# Altium PCB stepperRegulator.PcbDoc
Units mil, origin at the board's own origin, x right, y up, seen from the top; angles counter-clockwise.
Board outline 4921.26 x 3937.01 mil, 2 copper layers (Top Layer, Bottom Layer); 128 components, 46 nets, 316 pads, 67 vias.
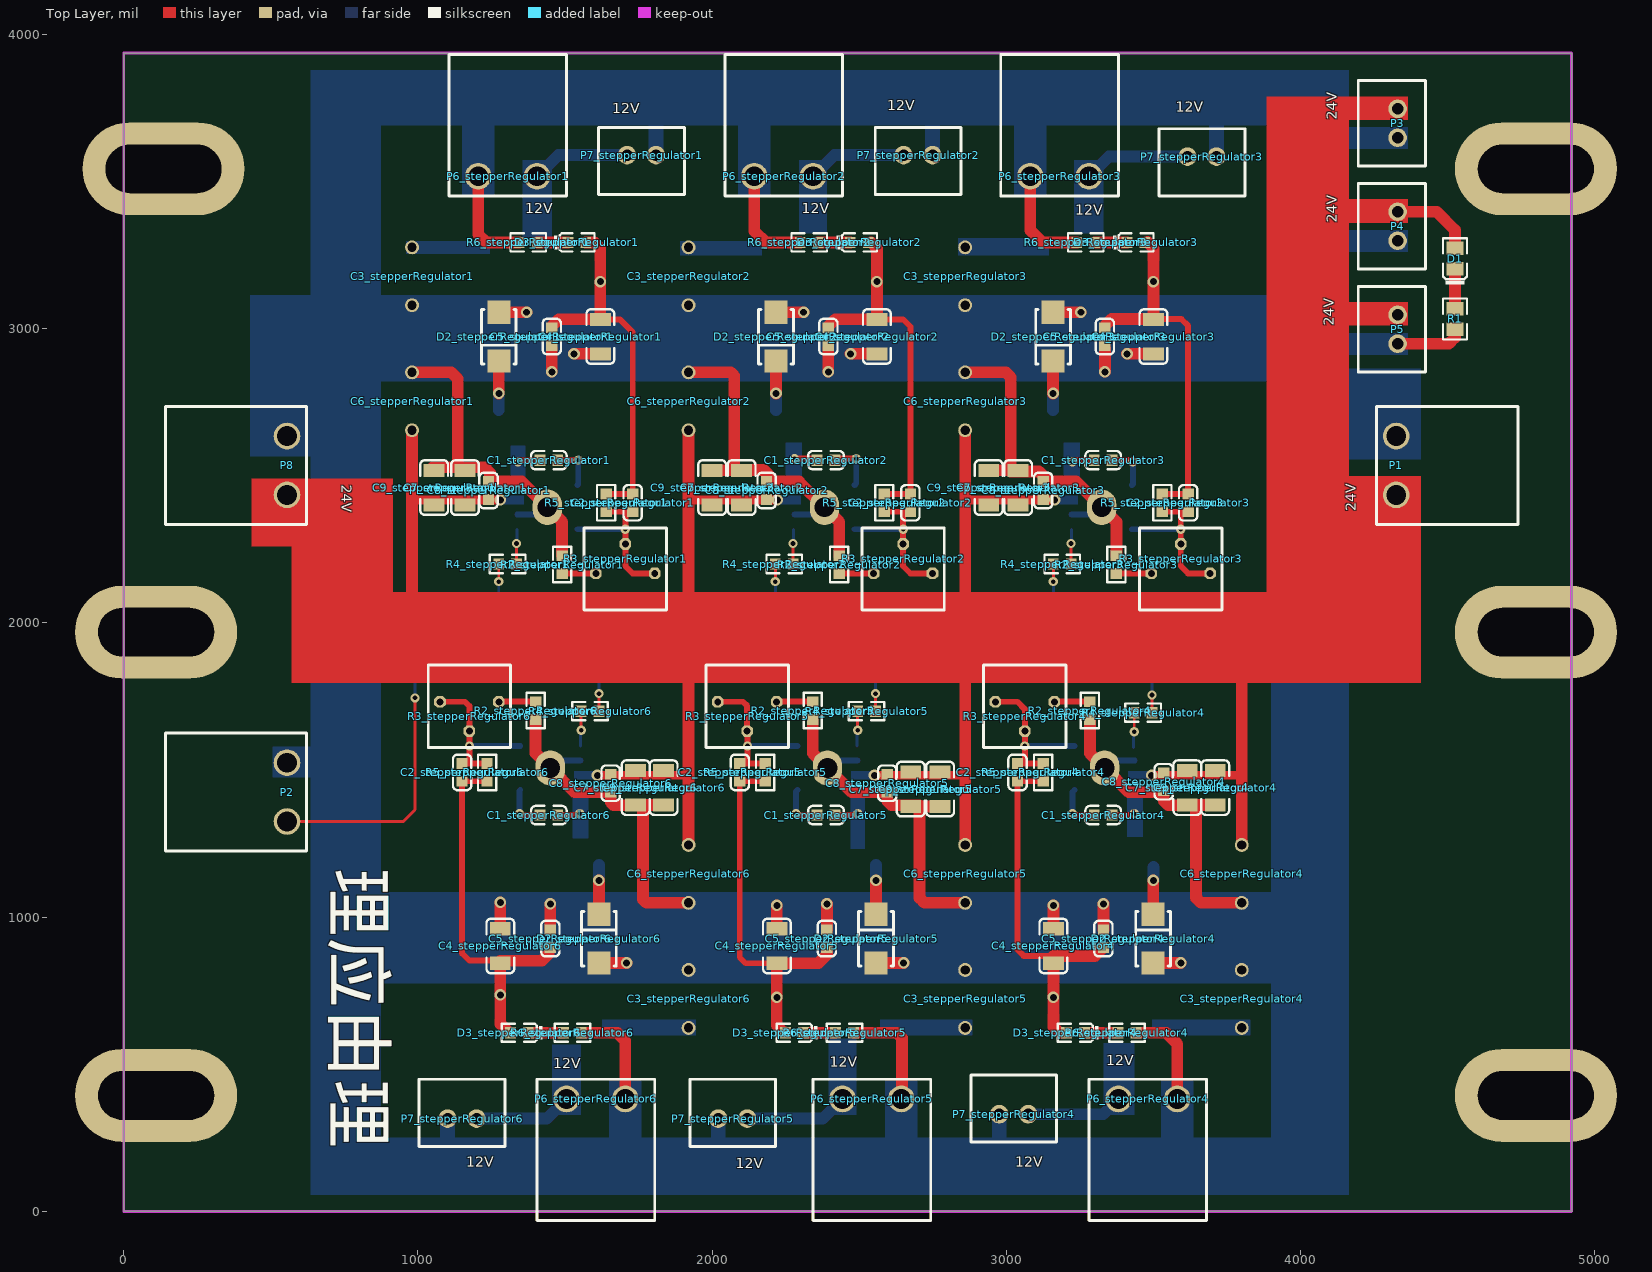
[diagram p0: Top Layer view]
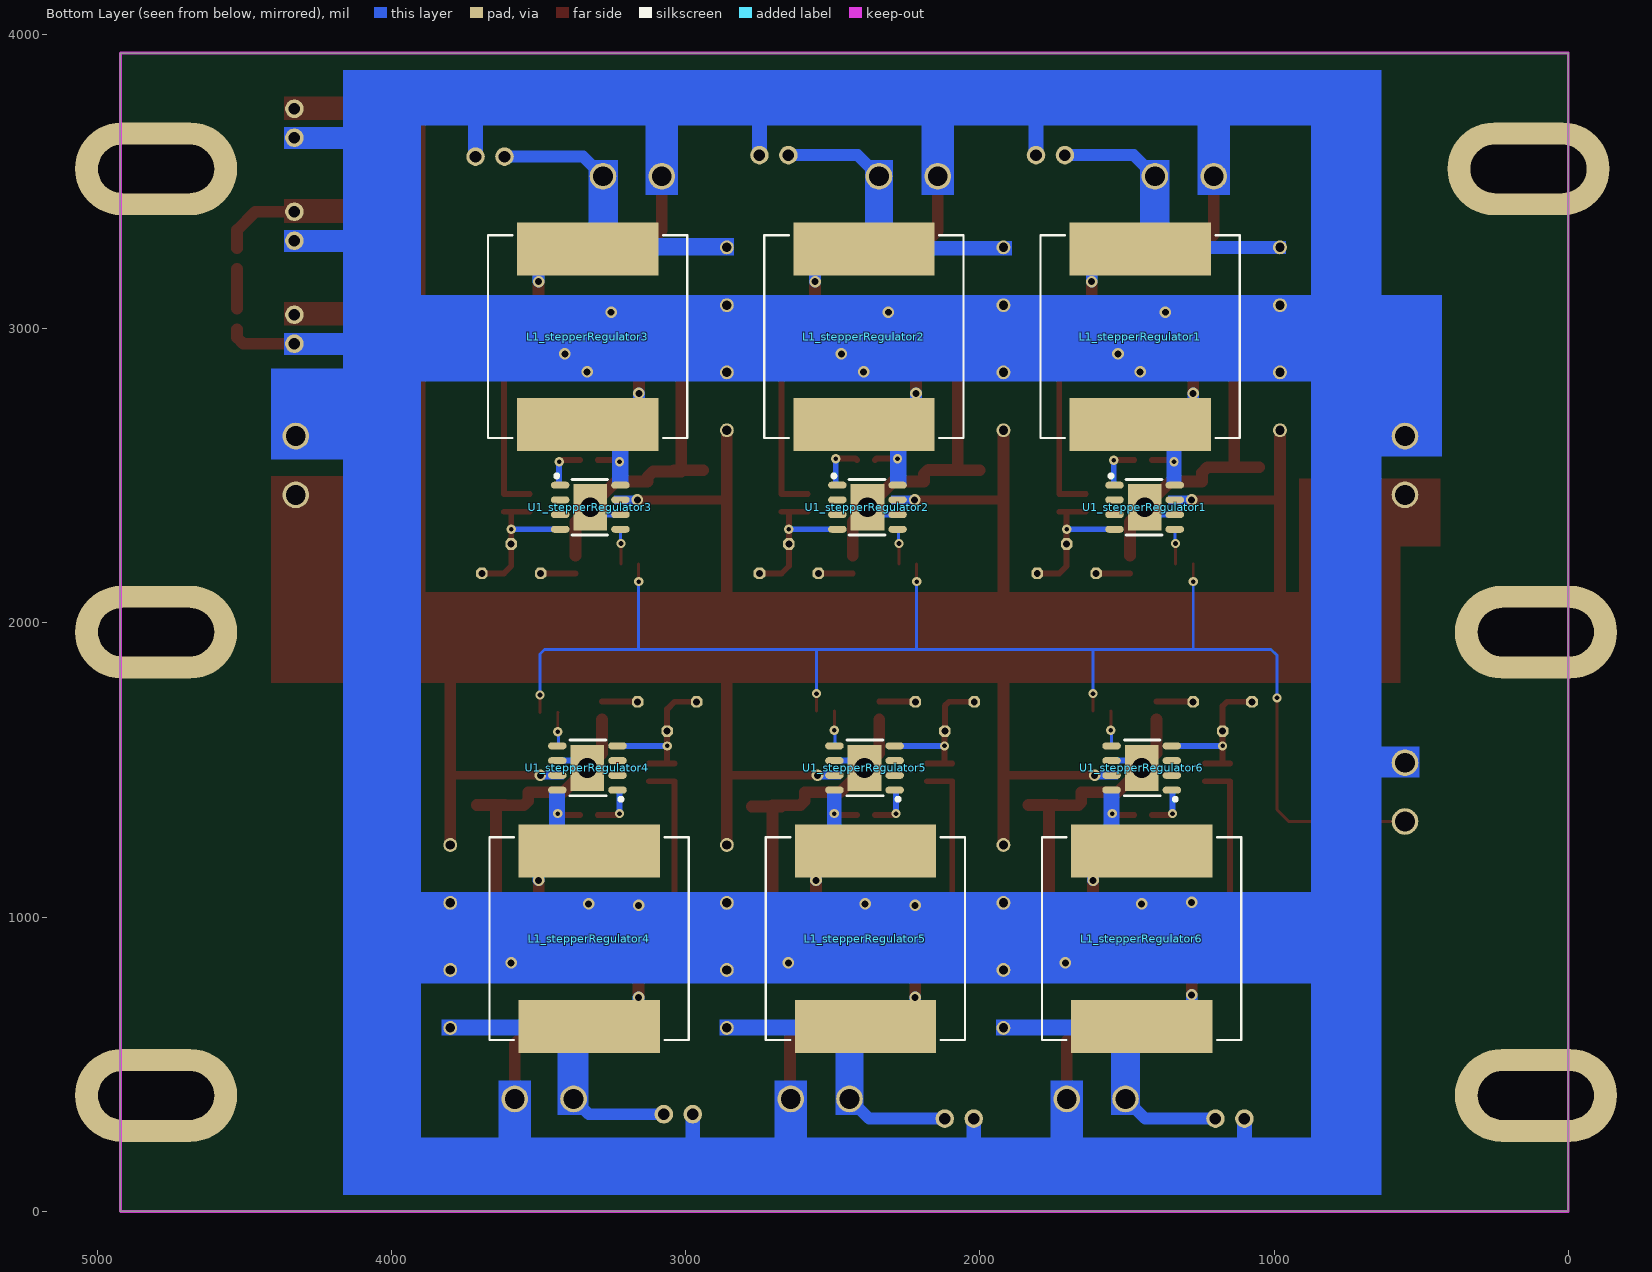
[diagram p1: Bottom Layer view, seen from below]
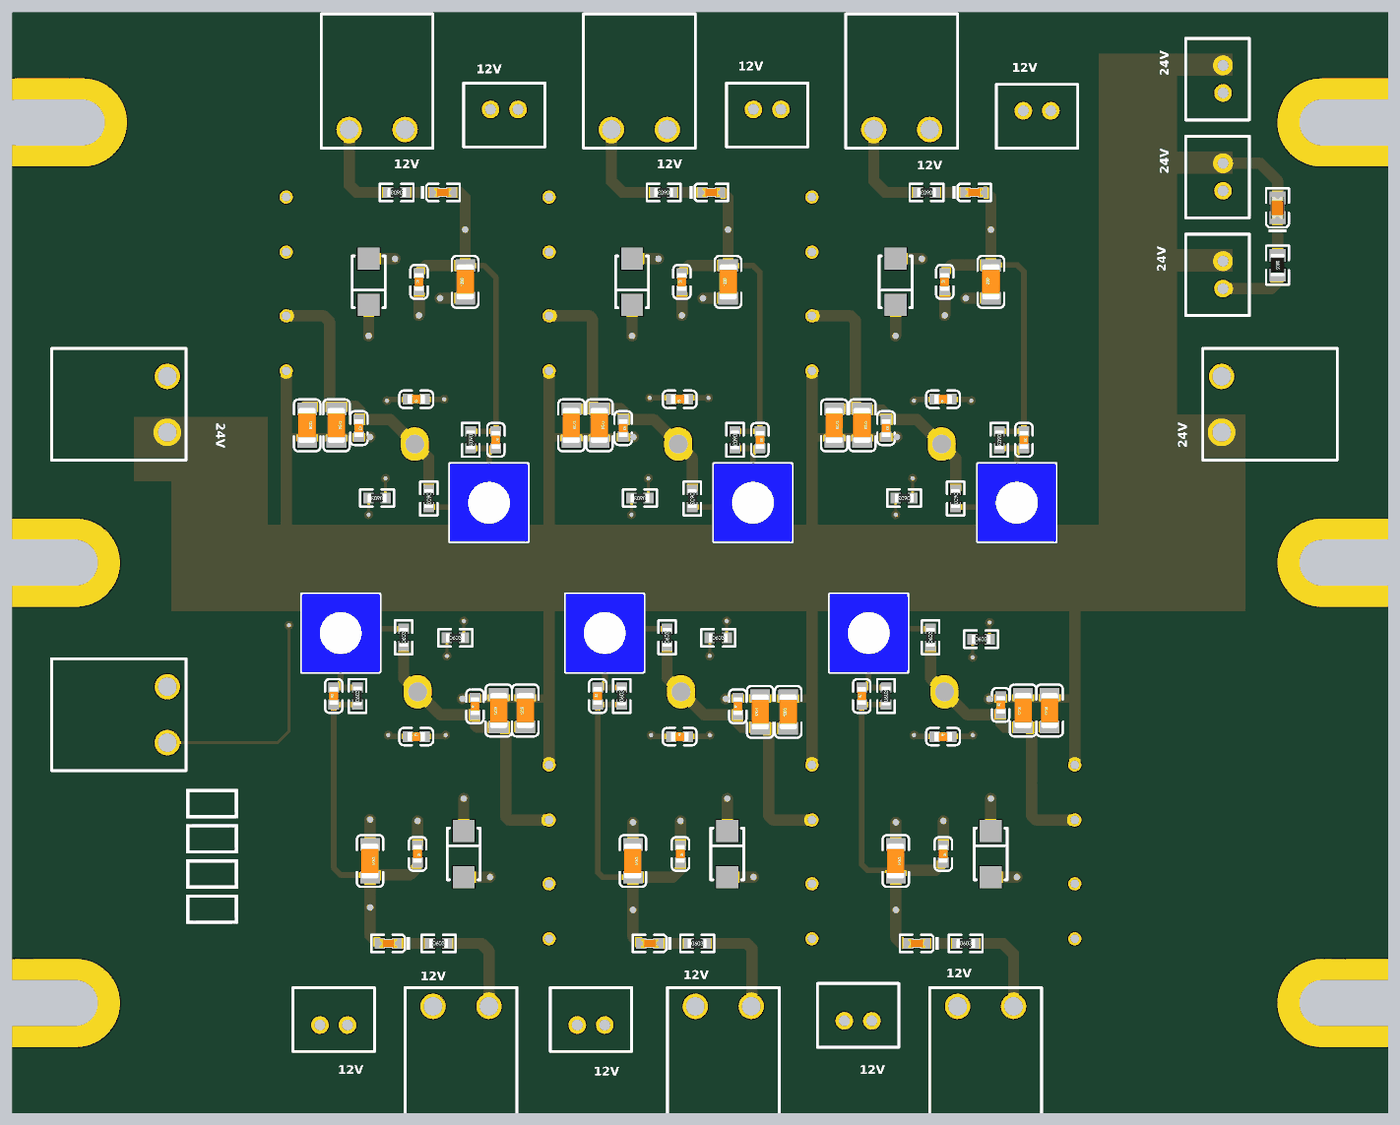
[diagram p2: 3D render of the assembled board from above, using the file's embedded part models]

## Layer stack, top to bottom
Top Layer: signal copper 1.4
Dielectric: dielectric 12.6, FR-4, Dk 4.8
Bottom Layer: signal copper 1.4

## Board outline
0,0 0,3937.01 4921.26,3937.01 4921.26,0

## Design rules (kind name [scope] priority, off if disabled: settings)
Clearance [All] p1: gap=10
PolygonConnect [All] p1: connectstyle=Relief reliefconductorwidth=10 reliefentries=4 polygonreliefangle="90 Angle" airgapwidth=10
RoutingVias [All] p1: holewidth=28 width=50 viastyle="Through Hole" minholewidth=28 minwidth=50 maxholewidth=28 maxwidth=50
SolderMaskExpansion [All] p1: expansion=4
Width [All] p1: maxlimit=80 minlimit=6 preferedwidth=20 minimp=50.000000 maximp=50.000000 favimp=50.000000
28 further rules are at their usual default settings.

## Classes and differential pairs
channel class TPS5450: stepperRegulator1 stepperRegulator2 stepperRegulator3 stepperRegulator4 stepperRegulator5 stepperRegulator6
net class SAFTY[1..6]: SAFTY6
component class stepperRegulator6: C1_stepperRegulator6 C2_stepperRegulator6 C3_stepperRegulator6 C4_stepperRegulator6 C5_stepperRegulator6 C6_stepperRegulator6 C7_stepperRegulator6 C8_stepperRegulator6 C9_stepperRegulator6 D2_stepperRegulator6 D3_stepperRegulator6 L1_stepperRegulator6 P6_stepperRegulator6 P7_stepperRegulator6 R2_stepperRegulator6 R3_stepperRegulator6 R4_stepperRegulator6 R5_stepperRegulator6 R6_stepperRegulator6 U1_stepperRegulator6
component class stepperRegulator5: C1_stepperRegulator5 C2_stepperRegulator5 C3_stepperRegulator5 C4_stepperRegulator5 C5_stepperRegulator5 C6_stepperRegulator5 C7_stepperRegulator5 C8_stepperRegulator5 C9_stepperRegulator5 D2_stepperRegulator5 D3_stepperRegulator5 L1_stepperRegulator5 P6_stepperRegulator5 P7_stepperRegulator5 R2_stepperRegulator5 R3_stepperRegulator5 R4_stepperRegulator5 R5_stepperRegulator5 R6_stepperRegulator5 U1_stepperRegulator5
component class stepperRegulator4: C1_stepperRegulator4 C2_stepperRegulator4 C3_stepperRegulator4 C4_stepperRegulator4 C5_stepperRegulator4 C6_stepperRegulator4 C7_stepperRegulator4 C8_stepperRegulator4 C9_stepperRegulator4 D2_stepperRegulator4 D3_stepperRegulator4 L1_stepperRegulator4 P6_stepperRegulator4 P7_stepperRegulator4 R2_stepperRegulator4 R3_stepperRegulator4 R4_stepperRegulator4 R5_stepperRegulator4 R6_stepperRegulator4 U1_stepperRegulator4
component class stepperRegulator3: C1_stepperRegulator3 C2_stepperRegulator3 C3_stepperRegulator3 C4_stepperRegulator3 C5_stepperRegulator3 C6_stepperRegulator3 C7_stepperRegulator3 C8_stepperRegulator3 C9_stepperRegulator3 D2_stepperRegulator3 D3_stepperRegulator3 L1_stepperRegulator3 P6_stepperRegulator3 P7_stepperRegulator3 R2_stepperRegulator3 R3_stepperRegulator3 R4_stepperRegulator3 R5_stepperRegulator3 R6_stepperRegulator3 U1_stepperRegulator3
component class stepperRegulator2: C1_stepperRegulator2 C2_stepperRegulator2 C3_stepperRegulator2 C4_stepperRegulator2 C5_stepperRegulator2 C6_stepperRegulator2 C7_stepperRegulator2 C8_stepperRegulator2 C9_stepperRegulator2 D2_stepperRegulator2 D3_stepperRegulator2 L1_stepperRegulator2 P6_stepperRegulator2 P7_stepperRegulator2 R2_stepperRegulator2 R3_stepperRegulator2 R4_stepperRegulator2 R5_stepperRegulator2 R6_stepperRegulator2 U1_stepperRegulator2
component class stepperRegulator1: C1_stepperRegulator1 C2_stepperRegulator1 C3_stepperRegulator1 C4_stepperRegulator1 C5_stepperRegulator1 C6_stepperRegulator1 C7_stepperRegulator1 C8_stepperRegulator1 C9_stepperRegulator1 D2_stepperRegulator1 D3_stepperRegulator1 L1_stepperRegulator1 P6_stepperRegulator1 P7_stepperRegulator1 R2_stepperRegulator1 R3_stepperRegulator1 R4_stepperRegulator1 R5_stepperRegulator1 R6_stepperRegulator1 U1_stepperRegulator1
component class mainPower: D1 P1 P2 P3 P4 P5 P8 R1

## Components (designator, comment, footprint, x,y, rotation, side; value= is the part's Value field where it differs from the comment)
C1_stepperRegulator1 "10nF (103) 10% 50V" 0603_C 1445,2553.15 r180 top (schematic designator C1)
C1_stepperRegulator2 "10nF (103) 10% 50V" 0603_C 2387,2553.15 r180 top (schematic designator C1)
C1_stepperRegulator3 "10nF (103) 10% 50V" 0603_C 3329,2553.15 r180 top (schematic designator C1)
C1_stepperRegulator4 "10nF (103) 10% 50V" 0603_C 3329,1346.85 r0 top (schematic designator C1)
C1_stepperRegulator5 "10nF (103) 10% 50V" 0603_C 2387,1346.85 r0 top (schematic designator C1)
C1_stepperRegulator6 "10nF (103) 10% 50V" 0603_C 1445,1346.85 r0 top (schematic designator C1)
C2_stepperRegulator1 "1nF (102) 10% 50V" 0603_C 1730,2408.15 r270 top (schematic designator C2)
C2_stepperRegulator2 "1nF (102) 10% 50V" 0603_C 2674,2408.15 r270 top (schematic designator C2)
C2_stepperRegulator3 "1nF (102) 10% 50V" 0603_C 3618,2408.15 r270 top (schematic designator C2)
C2_stepperRegulator4 "1nF (102) 10% 50V" 0603_C 3038,1491.85 r90 top (schematic designator C2)
C2_stepperRegulator5 "1nF (102) 10% 50V" 0603_C 2094,1491.85 r90 top (schematic designator C2)
C2_stepperRegulator6 "1nF (102) 10% 50V" 0603_C 1150,1491.85 r90 top (schematic designator C2)
C3_stepperRegulator1 "Cap" C100uF 980,3178.15 r180 top (schematic designator C3)
C3_stepperRegulator2 "Cap" C100uF 1920,3178.15 r180 top (schematic designator C3)
C3_stepperRegulator3 "Cap" C100uF 2860,3178.15 r180 top (schematic designator C3)
C3_stepperRegulator4 "Cap" C100uF 3800,721.85 r0 top (schematic designator C3)
C3_stepperRegulator5 "Cap" C100uF 2860,721.85 r0 top (schematic designator C3)
C3_stepperRegulator6 "Cap" C100uF 1920,721.85 r0 top (schematic designator C3)
C4_stepperRegulator1 "10uF (106) 10% 50V" 1206_C 1620,2973.15 r90 top (schematic designator C4)
C4_stepperRegulator2 "10uF (106) 10% 50V" 1206_C 2560,2973.15 r90 top (schematic designator C4)
C4_stepperRegulator3 "10uF (106) 10% 50V" 1206_C 3500,2973.15 r90 top (schematic designator C4)
C4_stepperRegulator4 "10uF (106) 10% 50V" 1206_C 3160,901.85 r270 top (schematic designator C4)
C4_stepperRegulator5 "10uF (106) 10% 50V" 1206_C 2220,901.85 r270 top (schematic designator C4)
C4_stepperRegulator6 "10uF (106) 10% 50V" 1206_C 1280,901.85 r270 top (schematic designator C4)
C5_stepperRegulator1 "10nF (103) 10% 50V" 0603_C 1455,2973.15 r90 top (schematic designator C5)
C5_stepperRegulator2 "10nF (103) 10% 50V" 0603_C 2395,2973.15 r90 top (schematic designator C5)
C5_stepperRegulator3 "10nF (103) 10% 50V" 0603_C 3335,2973.15 r90 top (schematic designator C5)
C5_stepperRegulator4 "10nF (103) 10% 50V" 0603_C 3330,926.85 r270 top (schematic designator C5)
C5_stepperRegulator5 "10nF (103) 10% 50V" 0603_C 2390,926.85 r270 top (schematic designator C5)
C5_stepperRegulator6 "10nF (103) 10% 50V" 0603_C 1450,926.85 r270 top (schematic designator C5)
C6_stepperRegulator1 "Cap" C100uF 980,2753.15 r0 top (schematic designator C6)
C6_stepperRegulator2 "Cap" C100uF 1920,2753.15 r0 top (schematic designator C6)
C6_stepperRegulator3 "Cap" C100uF 2860,2753.15 r0 top (schematic designator C6)
C6_stepperRegulator4 "Cap" C100uF 3800,1146.85 r180 top (schematic designator C6)
C6_stepperRegulator5 "Cap" C100uF 2860,1146.85 r180 top (schematic designator C6)
C6_stepperRegulator6 "Cap" C100uF 1920,1146.85 r180 top (schematic designator C6)
C7_stepperRegulator1 "10uF (106) 10% 50V" 1206_C 1160,2460 r270 top (schematic designator C7)
C7_stepperRegulator2 "10uF (106) 10% 50V" 1206_C 2100,2460 r270 top (schematic designator C7)
C7_stepperRegulator3 "10uF (106) 10% 50V" 1206_C 3040,2460 r270 top (schematic designator C7)
C7_stepperRegulator4 "10uF (106) 10% 50V" 1206_C 3615,1440 r90 top (schematic designator C7)
C7_stepperRegulator5 "10uF (106) 10% 50V" 1206_C 2675,1435 r90 top (schematic designator C7)
C7_stepperRegulator6 "10uF (106) 10% 50V" 1206_C 1740,1440 r90 top (schematic designator C7)
C8_stepperRegulator1 "10nF (103) 10% 50V" 0603_C 1240,2450 r270 top (schematic designator C8)
C8_stepperRegulator2 "10nF (103) 10% 50V" 0603_C 2185,2450 r270 top (schematic designator C8)
C8_stepperRegulator3 "10nF (103) 10% 50V" 0603_C 3125,2450 r270 top (schematic designator C8)
C8_stepperRegulator4 "10nF (103) 10% 50V" 0603_C 3535,1460 r90 top (schematic designator C8)
C8_stepperRegulator5 "10nF (103) 10% 50V" 0603_C 2595,1455 r90 top (schematic designator C8)
C8_stepperRegulator6 "10nF (103) 10% 50V" 0603_C 1655,1455 r90 top (schematic designator C8)
C9_stepperRegulator1 "10uF (106) 10% 50V" 1206_C 1055,2460 r270 top (schematic designator C9)
C9_stepperRegulator2 "10uF (106) 10% 50V" 1206_C 2000,2460 r270 top (schematic designator C9)
C9_stepperRegulator3 "10uF (106) 10% 50V" 1206_C 2940,2460 r270 top (schematic designator C9)
C9_stepperRegulator4 "10uF (106) 10% 50V" 1206_C 3710,1440 r90 top (schematic designator C9)
C9_stepperRegulator5 "10uF (106) 10% 50V" 1206_C 2775,1435 r90 top (schematic designator C9)
C9_stepperRegulator6 "10uF (106) 10% 50V" 1206_C 1835,1440 r90 top (schematic designator C9)
D1 "白灯 0805" 0805_LED_S1 4525,3238.15 r90 top
D2_stepperRegulator1 "SS54" SMA(DO-214AC)_S1 1275,2973.15 r90 top (schematic designator D2)
D2_stepperRegulator2 "SS54" SMA(DO-214AC)_S1 2217,2973.15 r90 top (schematic designator D2)
D2_stepperRegulator3 "SS54" SMA(DO-214AC)_S1 3159,2973.15 r90 top (schematic designator D2)
D2_stepperRegulator4 "SS54" SMA(DO-214AC)_S1 3499,926.85 r270 top (schematic designator D2)
D2_stepperRegulator5 "SS54" SMA(DO-214AC)_S1 2557,926.85 r270 top (schematic designator D2)
D2_stepperRegulator6 "SS54" SMA(DO-214AC)_S1 1615,926.85 r270 top (schematic designator D2)
D3_stepperRegulator1 "绿灯 0603" 0603_LED_S1 1540,3293.15 r0 top (schematic designator D3)
D3_stepperRegulator2 "绿灯 0603" 0603_LED_S1 2500.04,3293.15 r0 top (schematic designator D3)
D3_stepperRegulator3 "绿灯 0603" 0603_LED_S1 3440,3293.15 r0 top (schematic designator D3)
D3_stepperRegulator4 "绿灯 0603" 0603_LED_S1 3235,606.85 r180 top (schematic designator D3)
D3_stepperRegulator5 "绿灯 0603" 0603_LED_S1 2280,606.85 r180 top (schematic designator D3)
D3_stepperRegulator6 "绿灯 0603" 0603_LED_S1 1345,606.85 r180 top (schematic designator D3)
L1_stepperRegulator1 "Inductor" INDP175172X70M 1455,2973.15 r90 bottom (schematic designator L1)
L1_stepperRegulator2 "Inductor" INDP175172X70M 2394,2973.15 r90 bottom (schematic designator L1)
L1_stepperRegulator3 "Inductor" INDP175172X70M 3333,2973.15 r90 bottom (schematic designator L1)
L1_stepperRegulator4 "Inductor" INDP175172X70M 3328,926.85 r270 bottom (schematic designator L1)
L1_stepperRegulator5 "Inductor" INDP175172X70M 2389,926.85 r270 bottom (schematic designator L1)
L1_stepperRegulator6 "Inductor" INDP175172X70M 1450,926.85 r270 bottom (schematic designator L1)
P1 "Header 2" 5.08-2P 4325,2535 r90 top
P2 "Header 2" 5.08-2P 555,1425 r270 top
P3 "Header 2" XH-2A 4330,3698.15 r90 top
P4 "Header 2" XH-2A 4330,3348.15 r90 top
P5 "Header 2" XH-2A 4330,2998.15 r90 top
P6_stepperRegulator1 "Header 2" 5.08-2P 1305,3518.15 r180 top (schematic designator P6)
P6_stepperRegulator2 "Header 2" 5.08-2P 2243,3518.15 r180 top (schematic designator P6)
P6_stepperRegulator3 "Header 2" 5.08-2P 3181,3518.15 r180 top (schematic designator P6)
P6_stepperRegulator4 "Header 2" 5.08-2P 3481,381.85 r0 top (schematic designator P6)
P6_stepperRegulator5 "Header 2" 5.08-2P 2543,381.85 r0 top (schematic designator P6)
P6_stepperRegulator6 "Header 2" 5.08-2P 1605,381.85 r0 top (schematic designator P6)
P7_stepperRegulator1 "Header 2" XH-2A 1760,3590 r180 top (schematic designator P7)
P7_stepperRegulator2 "Header 2" XH-2A 2700,3590 r180 top (schematic designator P7)
P7_stepperRegulator3 "Header 2" XH-2A 3665,3585 r180 top (schematic designator P7)
P7_stepperRegulator4 "Header 2" XH-2A 3025,330 r0 top (schematic designator P7)
P7_stepperRegulator5 "Header 2" XH-2A 2070,315 r0 top (schematic designator P7)
P7_stepperRegulator6 "Header 2" XH-2A 1150,315 r0 top (schematic designator P7)
P8 "Header 2" 5.08-2P 555,2535 r270 top
R1 "10KΩ (1002) ±1%" 0805_R 4525,3033.15 r270 top
R2_stepperRegulator1 "510Ω (5100) ±1%" 0603_R 1490,2198.15 r270 top (schematic designator R2)
R2_stepperRegulator2 "510Ω (5100) ±1%" 0603_R 2432,2198.15 r270 top (schematic designator R2)
R2_stepperRegulator3 "510Ω (5100) ±1%" 0603_R 3374,2198.15 r270 top (schematic designator R2)
R2_stepperRegulator4 "510Ω (5100) ±1%" 0603_R 3284,1701.85 r90 top (schematic designator R2)
R2_stepperRegulator5 "510Ω (5100) ±1%" 0603_R 2342,1701.85 r90 top (schematic designator R2)
R2_stepperRegulator6 "510Ω (5100) ±1%" 0603_R 1400,1701.85 r90 top (schematic designator R2)
R3_stepperRegulator1 "RPot" RP1 1705,2218.15 r0 top (schematic designator R3)
R3_stepperRegulator2 "RPot" RP1 2649,2218.15 r0 top (schematic designator R3)
R3_stepperRegulator3 "RPot" RP1 3593,2218.15 r0 top (schematic designator R3)
R3_stepperRegulator4 "RPot" RP1 3063,1681.85 r180 top (schematic designator R3)
R3_stepperRegulator5 "RPot" RP1 2119,1681.85 r180 top (schematic designator R3)
R3_stepperRegulator6 "RPot" RP1 1175,1681.85 r180 top (schematic designator R3)
R4_stepperRegulator1 "100KΩ (1003) ±1%" 0603_R 1305,2200 r180 top (schematic designator R4)
R4_stepperRegulator2 "100KΩ (1003) ±1%" 0603_R 2245,2200 r180 top (schematic designator R4)
R4_stepperRegulator3 "100KΩ (1003) ±1%" 0603_R 3190,2200 r180 top (schematic designator R4)
R4_stepperRegulator4 "100KΩ (1003) ±1%" 0603_R 3465,1695 r0 top (schematic designator R4)
R4_stepperRegulator5 "100KΩ (1003) ±1%" 0603_R 2525,1700 r0 top (schematic designator R4)
R4_stepperRegulator6 "100KΩ (1003) ±1%" 0603_R 1585,1700 r0 top (schematic designator R4)
R5_stepperRegulator1 "10KΩ (1002) ±1%" 0603_R 1640,2408.15 r270 top (schematic designator R5)
R5_stepperRegulator2 "10KΩ (1002) ±1%" 0603_R 2585,2408.15 r270 top (schematic designator R5)
R5_stepperRegulator3 "10KΩ (1002) ±1%" 0603_R 3530,2408.15 r270 top (schematic designator R5)
R5_stepperRegulator4 "10KΩ (1002) ±1%" 0603_R 3125,1491.85 r90 top (schematic designator R5)
R5_stepperRegulator5 "10KΩ (1002) ±1%" 0603_R 2180,1491.85 r90 top (schematic designator R5)
R5_stepperRegulator6 "10KΩ (1002) ±1%" 0603_R 1235,1491.85 r90 top (schematic designator R5)
R6_stepperRegulator1 "10KΩ (1002) ±1%" 0603_R 1375,3293.15 r180 top (schematic designator R6)
R6_stepperRegulator2 "10KΩ (1002) ±1%" 0603_R 2330,3293.15 r180 top (schematic designator R6)
R6_stepperRegulator3 "10KΩ (1002) ±1%" 0603_R 3270,3293.15 r180 top (schematic designator R6)
R6_stepperRegulator4 "10KΩ (1002) ±1%" 0603_R 3410,606.85 r0 top (schematic designator R6)
R6_stepperRegulator5 "10KΩ (1002) ±1%" 0603_R 2450,606.85 r0 top (schematic designator R6)
R6_stepperRegulator6 "10KΩ (1002) ±1%" 0603_R 1525,606.85 r0 top (schematic designator R6)
U1_stepperRegulator1 "TPS5450" LC-SOP-8_EP_150mil 1440,2393.15 r270 bottom (schematic designator U1)
U1_stepperRegulator2 "TPS5450" LC-SOP-8_EP_150mil 2382,2393.15 r270 bottom (schematic designator U1)
U1_stepperRegulator3 "TPS5450" LC-SOP-8_EP_150mil 3324,2393.15 r270 bottom (schematic designator U1)
U1_stepperRegulator4 "TPS5450" LC-SOP-8_EP_150mil 3334,1506.85 r90 bottom (schematic designator U1)
U1_stepperRegulator5 "TPS5450" LC-SOP-8_EP_150mil 2392,1506.85 r90 bottom (schematic designator U1)
U1_stepperRegulator6 "TPS5450" LC-SOP-8_EP_150mil 1450,1506.85 r90 bottom (schematic designator U1)

## Footprints (in the part's own frame and the unit in brackets; to place one, negate y for a bottom-side part, rotate by r counter-clockwise, add the part's x,y. Pads: shape width x height; smd on the part's side, far side on the other; paste and mask are expansions set on the pad)
5.08-2P [mm]
  round 2.3 hole 1.7: 1(-2.54,0) 2(2.54,0)
  silkscreen extent -5.08,-10.5 5.08,1.7
0603_C [mm]
  rect 0.93x0.98 smd: 1(-0.77,0) 2(0.77,0)
  silkscreen extent -1.53,-0.79 1.54,0.79, body extent -0.8,-0.4 0.8,0.4, height 0.3
0603_LED_S1 [mm]
  rect 0.93x0.98 smd: A(0.77,0) K(-0.77,0)
  silkscreen extent -1.97,-0.79 1.54,0.79, body extent -0.8,-0.4 0.8,0.4, height 0.6
0603_R [mm]
  rect 0.93x0.98 smd: 1(-0.77,0) 2(0.77,0)
  silkscreen extent -1.53,-0.79 1.54,0.79, body extent -0.85,-0.4 0.85,0.4, height 0.56
0805_LED_S1 [mm]
  rect 1.16x1.47 smd: A(0.89,0) K(-0.89,0)
  silkscreen extent -2.24,-1.04 1.77,1.03, body extent -1.01,-0.62 1.01,0.62, height 1.1
0805_R [mm]
  rect 1.16x1.47 smd: 1(-0.89,0) 2(0.89,0)
  silkscreen extent -1.77,-1.04 1.77,1.03, body extent -1,-0.62 1,0.63, height 0.49
1206_C [mm]
  rect 1.13x1.8 smd: 1(-1.49,0) 2(1.49,0)
  silkscreen extent -2.36,-1.2 2.35,1.2, body extent -1.6,-0.81 1.6,0.79, height 1
C100uF [mm]
  round 1.2 hole 0.8: 1(0,2.5) 2(0,-2.5)
INDP175172X70M [mm] "Precision Wire Wound Inductor, 2-Leads, Body 17.50x17.15mm, IPC Low Density"
  rect 4.572x12.2 smd: 1(-7.575,0) 2(7.575,0)
  silkscreen extent -8.75,-8.6 8.75,8.6, body extent -8.75,-8.57 8.75,8.57, height 7
LC-SOP-8_EP_150mil [mm] "TPS5450"
  rect 4x2.9 smd: 0(0,0)
  oval 0.6x1.6 smd: 1(-1.905,-2.6) 2(-0.635,-2.6) 3(0.635,-2.6) 4(1.905,-2.6) 5(1.905,2.6) 6(0.635,2.6) 7(-0.635,2.6) 8(-1.905,2.6)
  silkscreen extent -2.85,-3.05 2.4,1.5
RP1 [mm]
  oct 1x1 hole 0.6: 1(-2.54,-1.27) 2(0,1.27) 3(2.54,-1.27)
  silkscreen extent -3.56,-4.44 3.56,2.67, body extent -3.56,-4.44 3.56,2.67, height 6.35
SMA(DO-214AC)_S1 [mm]
  rect 2x2 smd: 1(2.1,0) 2(-2.1,0)
  silkscreen extent -2.35,-1.5 2.35,1.5
XH-2A [mm]
  round 1.6 hole 1: 1(-1.25,0) 2(1.25,0)
  silkscreen extent -3.7,-2.4 3.7,3.4

## Part data
C1_stepperRegulator1 C1_stepperRegulator2 C1_stepperRegulator3 C1_stepperRegulator4 C1_stepperRegulator5 C1_stepperRegulator6 C5_stepperRegulator1 C5_stepperRegulator2 C5_stepperRegulator3 C5_stepperRegulator4 C5_stepperRegulator5 C5_stepperRegulator6 C8_stepperRegulator1 C8_stepperRegulator2 C8_stepperRegulator3 C8_stepperRegulator4 C8_stepperRegulator5 C8_stepperRegulator6: library part "0603 10nF (103) 10% 50V", "贴片电容"
C2_stepperRegulator1 C2_stepperRegulator2 C2_stepperRegulator3 C2_stepperRegulator4 C2_stepperRegulator5 C2_stepperRegulator6: library part "0603 1nF (102) 10% 50V", "贴片电容"
C3_stepperRegulator1 C3_stepperRegulator2 C3_stepperRegulator3 C3_stepperRegulator4 C3_stepperRegulator5 C3_stepperRegulator6 C6_stepperRegulator1 C6_stepperRegulator2 C6_stepperRegulator3 C6_stepperRegulator4 C6_stepperRegulator5 C6_stepperRegulator6: "贴片电容"
C4_stepperRegulator1 C4_stepperRegulator2 C4_stepperRegulator3 C4_stepperRegulator4 C4_stepperRegulator5 C4_stepperRegulator6 C7_stepperRegulator1 C7_stepperRegulator2 C7_stepperRegulator3 C7_stepperRegulator4 C7_stepperRegulator5 C7_stepperRegulator6 C9_stepperRegulator1 C9_stepperRegulator2 C9_stepperRegulator3 C9_stepperRegulator4 C9_stepperRegulator5 C9_stepperRegulator6: library part "1206 10uF (106) 10% 50V", "贴片电容"
D1: library part "0805 白灯", "发光二极管"
D2_stepperRegulator1 D2_stepperRegulator2 D2_stepperRegulator3 D2_stepperRegulator4 D2_stepperRegulator5 D2_stepperRegulator6: library part "SMA(DO-214AC) SS54", "二极管"
D3_stepperRegulator1 D3_stepperRegulator2 D3_stepperRegulator3 D3_stepperRegulator4 D3_stepperRegulator5 D3_stepperRegulator6: library part "0603 绿灯", "发光二极管"
P1 P2 P3 P4 P5 P6_stepperRegulator1 P6_stepperRegulator2 P6_stepperRegulator3 P6_stepperRegulator4 P6_stepperRegulator5 P6_stepperRegulator6 P7_stepperRegulator1 P7_stepperRegulator2 P7_stepperRegulator3 P7_stepperRegulator4 P7_stepperRegulator5 P7_stepperRegulator6 P8: "Header, 2-Pin"
R1: library part "0805 10KΩ (1002) 1%", "贴片电阻"
R2_stepperRegulator1 R2_stepperRegulator2 R2_stepperRegulator3 R2_stepperRegulator4 R2_stepperRegulator5 R2_stepperRegulator6: library part "0603 510Ω (5100) 1%", "贴片电阻"
R3_stepperRegulator1 R3_stepperRegulator2 R3_stepperRegulator3 R3_stepperRegulator4 R3_stepperRegulator5 R3_stepperRegulator6: "电位器"
R4_stepperRegulator1 R4_stepperRegulator2 R4_stepperRegulator3 R4_stepperRegulator4 R4_stepperRegulator5 R4_stepperRegulator6: library part "0603 100KΩ (1003) 1%", "贴片电阻"
R5_stepperRegulator1 R5_stepperRegulator2 R5_stepperRegulator3 R5_stepperRegulator4 R5_stepperRegulator5 R5_stepperRegulator6 R6_stepperRegulator1 R6_stepperRegulator2 R6_stepperRegulator3 R6_stepperRegulator4 R6_stepperRegulator5 R6_stepperRegulator6: library part "0603 10KΩ (1002) 1%", "贴片电阻"

## Free pads (board coordinates)
  oval 551.18x314.96 hole 165.35 slot 393.7 at 0 deg: 0(110,393.7) 0(110,1968.5) 0(135,3543.31) 0(4800,393.7) 0(4800,1968.5) 0(4800,3543.31)
  oval 100x120 hole 66.93: 0(1440,2393.15) 1(2382,2393.15) 2(3324,2393.15) 3(3334,1506.85) 4(2392,1506.85) 5(1450,1506.85)

## Via types
v1: diameter 39.37, hole 23.62, Top Layer to Bottom Layer, tented both sides, 36 vias
v2: diameter 31.5, hole 15.75, Top Layer to Bottom Layer, tented both sides, 31 vias

## Nets (pads, with @x,y where several pads share a name; then routed paths per layer and width w, separated by ;. In a path a pad name is that pad's centre, name@x,y a point inside that pad or via, vN(x,y) a via of type N, cw(c..) or ccw(c..) an arc to the next point about the centre after c; other vN are vias at no path point)
+24: C6_stepperRegulator1.2 C6_stepperRegulator2.2 C6_stepperRegulator3.2 C6_stepperRegulator4.2 C6_stepperRegulator5.2 C6_stepperRegulator6.2 C7_stepperRegulator1.2 C7_stepperRegulator2.2 C7_stepperRegulator3.2 C7_stepperRegulator4.2 C7_stepperRegulator5.2 C7_stepperRegulator6.2 C8_stepperRegulator1.2 C8_stepperRegulator2.2 C8_stepperRegulator3.2 C8_stepperRegulator4.2 C8_stepperRegulator5.2 C8_stepperRegulator6.2 C9_stepperRegulator1.2 C9_stepperRegulator2.2 C9_stepperRegulator3.2 C9_stepperRegulator4.2 C9_stepperRegulator5.2 C9_stepperRegulator6.2 D1.A P1.1 P3.2 P4.2 P5.2 P8.2 U1_stepperRegulator1.7 U1_stepperRegulator2.7 U1_stepperRegulator3.7 U1_stepperRegulator4.7 U1_stepperRegulator5.7 U1_stepperRegulator6.7 | length 4524.7
  Top Layer w40: 980,1933.15 C6_stepperRegulator1.2 ; C6_stepperRegulator6.2 C6_stepperRegulator2.2 ; C6_stepperRegulator5.2 C6_stepperRegulator3.2 ; C6_stepperRegulator4.2 3800,1946.85 ; P4.2 4462.64,3397.36 4525,3335 D1.A
  other v1: 1610,1481.85 2552,1481.85 3494,1481.85 1280,2418.15 2222,2418.15 3164,2418.15
EGND: C3_stepperRegulator1.1 C3_stepperRegulator2.1 C3_stepperRegulator3.1 C3_stepperRegulator4.1 C3_stepperRegulator5.1 C3_stepperRegulator6.1 C4_stepperRegulator1.1 C4_stepperRegulator2.1 C4_stepperRegulator3.1 C4_stepperRegulator4.1 C4_stepperRegulator5.1 C4_stepperRegulator6.1 C5_stepperRegulator1.1 C5_stepperRegulator2.1 C5_stepperRegulator3.1 C5_stepperRegulator4.1 C5_stepperRegulator5.1 C5_stepperRegulator6.1 C6_stepperRegulator1.1 C6_stepperRegulator2.1 C6_stepperRegulator3.1 C6_stepperRegulator4.1 C6_stepperRegulator5.1 C6_stepperRegulator6.1 C7_stepperRegulator1.1 C7_stepperRegulator2.1 C7_stepperRegulator3.1 C7_stepperRegulator4.1 C7_stepperRegulator5.1 C7_stepperRegulator6.1 C8_stepperRegulator1.1 C8_stepperRegulator2.1 C8_stepperRegulator3.1 C8_stepperRegulator4.1 C8_stepperRegulator5.1 C8_stepperRegulator6.1 C9_stepperRegulator1.1 C9_stepperRegulator2.1 C9_stepperRegulator3.1 C9_stepperRegulator4.1 C9_stepperRegulator5.1 C9_stepperRegulator6.1 D2_stepperRegulator1.1 D2_stepperRegulator2.1 D2_stepperRegulator3.1 D2_stepperRegulator4.1 D2_stepperRegulator5.1 D2_stepperRegulator6.1 P1.2 P2.1 P3.1 P4.1 P5.1 P6_stepperRegulator1.2 P6_stepperRegulator2.2 P6_stepperRegulator3.2 P6_stepperRegulator4.2 P6_stepperRegulator5.2 P6_stepperRegulator6.2 P7_stepperRegulator1.1 P7_stepperRegulator2.1 P7_stepperRegulator3.1 P7_stepperRegulator4.1 P7_stepperRegulator5.1 P7_stepperRegulator6.1 P8.1 pad.0@1440,2393.15 pad.1 pad.2 pad.3 pad.4 pad.5 R1.2 R2_stepperRegulator1.1 R2_stepperRegulator2.1 R2_stepperRegulator3.1 R2_stepperRegulator4.1 R2_stepperRegulator5.1 R2_stepperRegulator6.1 R6_stepperRegulator1.2 R6_stepperRegulator2.2 R6_stepperRegulator3.2 R6_stepperRegulator4.2 R6_stepperRegulator5.2 R6_stepperRegulator6.2 U1_stepperRegulator1.0 U1_stepperRegulator1.6 U1_stepperRegulator2.0 U1_stepperRegulator2.6 U1_stepperRegulator3.0 U1_stepperRegulator3.6 U1_stepperRegulator4.0 U1_stepperRegulator4.6 U1_stepperRegulator5.0 U1_stepperRegulator5.6 U1_stepperRegulator6.0 U1_stepperRegulator6.6 | length 12550.6
  Top Layer w40: C6_stepperRegulator1.1 1113.43,2851.57 1135,2830 C7_stepperRegulator1.1@1135,2528.66 ; C9_stepperRegulator1.1@1050,2528.66 C7_stepperRegulator1.1@1135,2528.66 ; P6_stepperRegulator1.2 1205,3320 1231.85,3293.15 R6_stepperRegulator1.2 ; D2_stepperRegulator1.1 v1(1369.17,3055.83) ; C4_stepperRegulator6.1@1280,970.51 v1(1280,1050) ; R2_stepperRegulator6.1 1400,1556.85 pad.5 1532.17,1424.69 C8_stepperRegulator6.1 1655,1390 1665,1380 1765,1380 1765,1060 1776.57,1048.43 C6_stepperRegulator6.1 ; C5_stepperRegulator6.1 v1(1450,1045) ; v1(1455,2853.35) C5_stepperRegulator1.1@1455,2932.83 ; R2_stepperRegulator1.1 1490,2343.15 1440,2393.15 1352.83,2480.31 1245,2480.31 1245,2510 1226.34,2528.66 C7_stepperRegulator1.1@1135,2528.66 ; v1(1530.51,2914.49) C4_stepperRegulator1.1@1610,2914.49 ; R6_stepperRegulator6.2 1678.15,606.85 1705,580 P6_stepperRegulator6.2 ; D2_stepperRegulator6.1 v1(1709.17,844.17) ; C7_stepperRegulator6.1 C9_stepperRegulator6.1 ; C6_stepperRegulator2.1 2063.43,2851.57 2075,2840 2075,2520 2175,2520 2190,2505 2190,2480.31 2294.83,2480.31 pad.1 2432,2343.15 R2_stepperRegulator2.1 ; C9_stepperRegulator2.1 C7_stepperRegulator2.1 ; P6_stepperRegulator2.2 2143,3332 2181.85,3293.15 R6_stepperRegulator2.2 ; D2_stepperRegulator2.1 v1(2311.17,3055.83) ; C4_stepperRegulator5.1 v1(2220,1040) ; R2_stepperRegulator5.1 2342,1556.85 pad.4 2474.17,1424.69 C8_stepperRegulator5.1 2595,1395 2610,1380 2705,1380 2705,1065 2721.57,1048.43 C6_stepperRegulator5.1 ; C5_stepperRegulator5.1 v1(2390,1045) ; v1(2395,2853.35) C5_stepperRegulator2.1@2395,2932.83 ; v1(2470.51,2914.49) C4_stepperRegulator2.1@2550,2914.49 ; R6_stepperRegulator5.2 2628.15,606.85 2645,590 2645,383.85 P6_stepperRegulator5.2 ; D2_stepperRegulator5.1 v1(2651.17,844.17) ; C7_stepperRegulator5.1 C9_stepperRegulator5.1 ; C6_stepperRegulator3.1 2998.43,2851.57 3015,2835 3015,2515 3110,2515 3130,2495 3130,2480.31 3236.83,2480.31 pad.2 3374,2343.15 R2_stepperRegulator3.1 ; C9_stepperRegulator3.1 C7_stepperRegulator3.1 ; P6_stepperRegulator3.2 3081,3334 3121.85,3293.15 R6_stepperRegulator3.2 ; D2_stepperRegulator3.1 v1(3253.17,3055.83) ; C4_stepperRegulator4.1 v1(3160,1040) ; R2_stepperRegulator4.1 3284,1556.85 pad.3 3416.17,1424.69 3535,1424.69 3535,1395 3550,1380 3645,1380 3645,1065 3661.57,1048.43 C6_stepperRegulator4.1 ; C5_stepperRegulator4.1 v1(3330,1045) ; v1(3335,2853.35) C5_stepperRegulator3.1@3335,2932.83 ; v1(3410.51,2914.49) C4_stepperRegulator3.1@3490,2914.49 ; R6_stepperRegulator4.2 3543.15,606.85 3581,569 P6_stepperRegulator4.2 ; D2_stepperRegulator4.1 v1(3593.17,844.17) ; C7_stepperRegulator4.1 C9_stepperRegulator4.1 ; P5.1 4503.94,2948.94 4525,2970 R1.2
  Bottom Layer w20: U1_stepperRegulator1.6 1415,2368.15 U1_stepperRegulator1.0 ; pad.5 1475,1531.85 U1_stepperRegulator6.6 ; U1_stepperRegulator2.6 2357,2368.15 pad.1 ; pad.4 2417,1531.85 U1_stepperRegulator5.6 ; U1_stepperRegulator3.6 3299,2368.15 pad.2 ; pad.3 3359,1531.85 U1_stepperRegulator4.6
  Bottom Layer w50: 1100,135 1100.79,135.79 P7_stepperRegulator6.1 ; 1805,3775 1809.21,3770.79 P7_stepperRegulator1.1 ; P7_stepperRegulator5.1 2020.79,129.21 2025,125 ; 2745,3785 2749.21,3780.79 P7_stepperRegulator2.1 ; 2975,140 2975.79,140.79 P7_stepperRegulator4.1 ; 3710,3765 3714.21,3760.79 P7_stepperRegulator3.1
NetC1_stepperRegulator1_1: C1_stepperRegulator1.1 U1_stepperRegulator1.1 | length 155.8
  Top Layer w20: C1_stepperRegulator1.1 v2(1545,2553.15)
  Bottom Layer w20: U1_stepperRegulator1.1 1545,2470.79 v2(1545,2553.15)
NetC1_stepperRegulator1_2: C1_stepperRegulator1.2 D2_stepperRegulator1.2 L1_stepperRegulator1.1 U1_stepperRegulator1.8 | length 244.1
  Top Layer w20: v2(1340,2548.15) 1345,2553.15 C1_stepperRegulator1.2
  Top Layer w40: v1(1275,2780) D2_stepperRegulator1.2
  Bottom Layer w40: L1_stepperRegulator1.1@1275,2723.15 v1(1275,2780)
NetC1_stepperRegulator2_1: C1_stepperRegulator2.1 U1_stepperRegulator2.1 | length 167.1
  Top Layer w20: C1_stepperRegulator2.1 2422.31,2558.15 v2(2490,2558.15)
  Bottom Layer w20: U1_stepperRegulator2.1 2490,2473.79 v2(2490,2558.15)
NetC1_stepperRegulator2_2: C1_stepperRegulator2.2 D2_stepperRegulator2.2 L1_stepperRegulator2.1 U1_stepperRegulator2.8 | length 246.1
  Top Layer w20: v2(2280,2558.15) 2351.69,2558.15 C1_stepperRegulator2.2
  Top Layer w40: v1(2217,2780) D2_stepperRegulator2.2
  Bottom Layer w40: L1_stepperRegulator2.1@2217,2723.15 v1(2217,2780)
NetC1_stepperRegulator3_1: C1_stepperRegulator3.1 U1_stepperRegulator3.1 | length 154.3
  Top Layer w20: C1_stepperRegulator3.1 3425,2553.15 v2(3430,2548.15)
  Bottom Layer w20: U1_stepperRegulator3.1 3430,2471.79 v2(3430,2548.15)
NetC1_stepperRegulator3_2: C1_stepperRegulator3.2 D2_stepperRegulator3.2 L1_stepperRegulator3.1 U1_stepperRegulator3.8 | length 243.1
  Top Layer w20: v2(3225,2548.15) 3230,2553.15 C1_stepperRegulator3.2
  Top Layer w40: v1(3159,2780) D2_stepperRegulator3.2
  Bottom Layer w40: L1_stepperRegulator3.1@3159,2723.15 v1(3159,2780)
NetC1_stepperRegulator4_1: C1_stepperRegulator4.1 U1_stepperRegulator4.1 | length 158.5
  Top Layer w20: v2(3225,1351.85) 3230,1346.85 C1_stepperRegulator4.1
  Bottom Layer w20: v2(3225,1351.85) 3225,1425.21 U1_stepperRegulator4.1
NetC1_stepperRegulator4_2: C1_stepperRegulator4.2 D2_stepperRegulator4.2 L1_stepperRegulator4.1 U1_stepperRegulator4.8 | length 238.2
  Top Layer w20: C1_stepperRegulator4.2 3430,1346.85 v2(3435,1351.85)
  Top Layer w40: D2_stepperRegulator4.2 v1@3499,1125
  Bottom Layer w40: v1(3500,1125) L1_stepperRegulator4.1@3500,1170
NetC1_stepperRegulator5_1: C1_stepperRegulator5.1 U1_stepperRegulator5.1 | length 155.7
  Top Layer w20: v2(2285,1351.85) 2290,1346.85 C1_stepperRegulator5.1
  Bottom Layer w20: v2(2285,1351.85) 2285,1427.21 U1_stepperRegulator5.1
NetC1_stepperRegulator5_2: C1_stepperRegulator5.2 D2_stepperRegulator5.2 L1_stepperRegulator5.1 U1_stepperRegulator5.8 | length 247.1
  Top Layer w20: C1_stepperRegulator5.2 2490,1346.85 v2(2495,1351.85)
  Top Layer w40: D2_stepperRegulator5.2 v1(2557,1125)
  Bottom Layer w40: v1(2557,1125) L1_stepperRegulator5.1@2557,1176.85
NetC1_stepperRegulator6_1: C1_stepperRegulator6.1 U1_stepperRegulator6.1 | length 152.8
  Top Layer w20: v2(1345,1351.85) 1350,1346.85 C1_stepperRegulator6.1
  Bottom Layer w20: v2(1345,1351.85) 1345,1429.21 U1_stepperRegulator6.1
NetC1_stepperRegulator6_2: C1_stepperRegulator6.2 D2_stepperRegulator6.2 L1_stepperRegulator6.1 U1_stepperRegulator6.8 | length 244.1
  Top Layer w20: C1_stepperRegulator6.2 1545,1346.85 v2(1550,1351.85)
  Top Layer w40: D2_stepperRegulator6.2 v1(1615,1125)
  Bottom Layer w40: v1(1615,1125) L1_stepperRegulator6.1@1615,1176.85
NetC2_stepperRegulator1_2: C2_stepperRegulator1.2 R3_stepperRegulator1.2 R3_stepperRegulator1.3 R5_stepperRegulator1.2 U1_stepperRegulator1.4 | length 547.7
  Top Layer w20: R5_stepperRegulator1.2 1705,2377.83 ; C2_stepperRegulator1.2 1705,2377.83 ; R3_stepperRegulator1.3 1730,2168.15 1705,2193.15 R3_stepperRegulator1.2 1705,2377.83
  Bottom Layer w20: U1_stepperRegulator1.4 v2(1705,2318.15)
NetC2_stepperRegulator2_2: C2_stepperRegulator2.2 R3_stepperRegulator2.2 R3_stepperRegulator2.3 R5_stepperRegulator2.2 U1_stepperRegulator2.4 | length 546.3
  Top Layer w20: R5_stepperRegulator2.2 2645,2377.83 ; C2_stepperRegulator2.2 2645,2377.83 ; R3_stepperRegulator2.3 2674,2168.15 2649,2193.15 R3_stepperRegulator2.2 2649,2373.83 2645,2377.83
  Bottom Layer w20: U1_stepperRegulator2.4 v2@2645,2318.15
  other v2: 2650,2318.15
NetC2_stepperRegulator3_2: C2_stepperRegulator3.2 R3_stepperRegulator3.2 R3_stepperRegulator3.3 R5_stepperRegulator3.2 U1_stepperRegulator3.4 | length 547.9
  Top Layer w20: R5_stepperRegulator3.2 3590,2377.83 ; C2_stepperRegulator3.2 3590,2377.83 ; R3_stepperRegulator3.3 3618,2168.15 3593,2193.15 R3_stepperRegulator3.2 3593,2374.83 3590,2377.83
  Bottom Layer w20: U1_stepperRegulator3.4 v2@3590,2318.15
  other v2: 3593,2318.15
NetC2_stepperRegulator4_2: C2_stepperRegulator4.2 R3_stepperRegulator4.2 R3_stepperRegulator4.3 R5_stepperRegulator4.2 U1_stepperRegulator4.4 | length 549.5
  Top Layer w20: R3_stepperRegulator4.3 3038,1731.85 3063,1706.85 R3_stepperRegulator4.2 3063,1524.17 3065,1522.17 ; C2_stepperRegulator4.2 3065,1522.17 ; R5_stepperRegulator4.2 3065,1522.17
  Bottom Layer w20: v2@3065,1581.85 U1_stepperRegulator4.4
  other v2: 3063,1581.85
NetC2_stepperRegulator5_2: C2_stepperRegulator5.2 R3_stepperRegulator5.2 R3_stepperRegulator5.3 R5_stepperRegulator5.2 U1_stepperRegulator5.4 | length 557.5
  Top Layer w20: R3_stepperRegulator5.3 2105,1731.85 2119,1717.85 R3_stepperRegulator5.2 2120,1630.85 2120,1522.17 ; C2_stepperRegulator5.2 2120,1522.17 ; R5_stepperRegulator5.2 2120,1522.17
  Bottom Layer w20: v2(2120,1581.85) U1_stepperRegulator5.4
NetC2_stepperRegulator6_2: C2_stepperRegulator6.2 R3_stepperRegulator6.2 R3_stepperRegulator6.3 R5_stepperRegulator6.2 U1_stepperRegulator6.4 | length 558.5
  Top Layer w20: R3_stepperRegulator6.3 1160,1731.85 1175,1716.85 R3_stepperRegulator6.2 1175,1522.17 ; C2_stepperRegulator6.2 1175,1522.17 ; R5_stepperRegulator6.2 1175,1522.17
  Bottom Layer w20: v2(1175,1581.85) U1_stepperRegulator6.4
NetD1_K: D1.K R1.1 | length 134.9
  Top Layer w40: R1.1 D1.K
NetD3_stepperRegulator1_K: D3_stepperRegulator1.K R6_stepperRegulator1.1 | length 104.4
  Top Layer w40: R6_stepperRegulator1.1 D3_stepperRegulator1.K
NetD3_stepperRegulator2_K: D3_stepperRegulator2.K R6_stepperRegulator2.1 | length 109.4
  Top Layer w40: R6_stepperRegulator2.1 D3_stepperRegulator2.K
NetD3_stepperRegulator3_K: D3_stepperRegulator3.K R6_stepperRegulator3.1 | length 109.4
  Top Layer w40: R6_stepperRegulator3.1 D3_stepperRegulator3.K
NetD3_stepperRegulator4_K: D3_stepperRegulator4.K R6_stepperRegulator4.1 | length 114.4
  Top Layer w40: D3_stepperRegulator4.K R6_stepperRegulator4.1
NetD3_stepperRegulator5_K: D3_stepperRegulator5.K R6_stepperRegulator5.1 | length 109.4
  Top Layer w40: D3_stepperRegulator5.K R6_stepperRegulator5.1
NetD3_stepperRegulator6_K: D3_stepperRegulator6.K R6_stepperRegulator6.1 | length 119.4
  Top Layer w40: D3_stepperRegulator6.K R6_stepperRegulator6.1
NetR2_stepperRegulator1_2: R2_stepperRegulator1.2 R3_stepperRegulator1.1 | length 115.1
  Top Layer w20: R2_stepperRegulator1.2 1604.68,2167.83 R3_stepperRegulator1.1
NetR2_stepperRegulator2_2: R2_stepperRegulator2.2 R3_stepperRegulator2.1 | length 117.1
  Top Layer w20: R2_stepperRegulator2.2 2548.68,2167.83 R3_stepperRegulator2.1
NetR2_stepperRegulator3_2: R2_stepperRegulator3.2 R3_stepperRegulator3.1 | length 119.1
  Top Layer w20: R2_stepperRegulator3.2 3492.68,2167.83 R3_stepperRegulator3.1
NetR2_stepperRegulator4_2: R2_stepperRegulator4.2 R3_stepperRegulator4.1 | length 121.1
  Top Layer w20: R3_stepperRegulator4.1 3163.32,1732.17 R2_stepperRegulator4.2
NetR2_stepperRegulator5_2: R2_stepperRegulator5.2 R3_stepperRegulator5.1 | length 123.1
  Top Layer w20: R3_stepperRegulator5.1 2219.32,1732.17 R2_stepperRegulator5.2
NetR2_stepperRegulator6_2: R2_stepperRegulator6.2 R3_stepperRegulator6.1 | length 125.1
  Top Layer w20: R3_stepperRegulator6.1 1275.32,1732.17 R2_stepperRegulator6.2
NetR4_stepperRegulator1_1: R4_stepperRegulator1.1 U1_stepperRegulator1.5 | length 119
  Top Layer w10: v2(1335,2270) 1335.31,2269.69 R4_stepperRegulator1.1
  Bottom Layer w10: v2(1335,2270) 1336.64,2271.64 U1_stepperRegulator1.5@1336.64,2318.15
NetR4_stepperRegulator2_1: R4_stepperRegulator2.1 U1_stepperRegulator2.5 | length 119
  Top Layer w10: v2(2275,2270) 2275.31,2269.69 R4_stepperRegulator2.1
  Bottom Layer w10: v2(2275,2270) 2276.64,2271.64 U1_stepperRegulator2.5@2276.64,2318.15
NetR4_stepperRegulator3_1: R4_stepperRegulator3.1 U1_stepperRegulator3.5 | length 119
  Top Layer w10: v2(3220,2270) 3220.31,2269.69 R4_stepperRegulator3.1
  Bottom Layer w10: v2(3220,2270) 3221.64,2271.64 U1_stepperRegulator3.5
NetR4_stepperRegulator4_1: R4_stepperRegulator4.1 U1_stepperRegulator4.5 | length 119.4
  Top Layer w10: R4_stepperRegulator4.1@3434.37,1695.31 R4_stepperRegulator4.1 v2(3434.69,1630.31)
  Bottom Layer w10: U1_stepperRegulator4.5@3432.05,1577.17 3432.05,1627.68 v2(3434.69,1630.31)
NetR4_stepperRegulator5_1: R4_stepperRegulator5.1 U1_stepperRegulator5.5 | length 119.4
  Top Layer w10: R4_stepperRegulator5.1@2494.37,1700.31 R4_stepperRegulator5.1 v2(2494.69,1635.31)
  Bottom Layer w10: U1_stepperRegulator5.5@2492.05,1582.17 2492.05,1632.68 v2(2494.69,1635.31)
NetR4_stepperRegulator6_1: R4_stepperRegulator6.1 U1_stepperRegulator6.5 | length 119.4
  Top Layer w10: R4_stepperRegulator6.1 1555,1699.69 v2(1555,1635)
  Bottom Layer w10: U1_stepperRegulator6.5 1552.36,1632.36 v2(1555,1635)
SAFTY6: P2.2 R4_stepperRegulator1.2 R4_stepperRegulator2.2 R4_stepperRegulator3.2 R4_stepperRegulator4.2 R4_stepperRegulator5.2 R4_stepperRegulator6.2 | length 4986.8
  Top Layer w10: P2.2 950,1325 990,1365 v2(990,1745) ; v2(1274.68,2140.32) R4_stepperRegulator1.2 ; R4_stepperRegulator6.2 v2(1615.32,1759.68) ; v2(2214.68,2140.32) R4_stepperRegulator2.2 ; R4_stepperRegulator5.2 v2(2555.32,1759.68) ; v2(3159.68,2140.32) R4_stepperRegulator3.2 ; R4_stepperRegulator4.2 v2(3495.32,1754.68)
  Bottom Layer w10: v2(990,1745) 990,1890 1010,1910 1275,1910 ; v2(1274.68,2140.32) 1274.68,1910.32 1275,1910 ; v2(1615.32,1759.68) 1615.32,1909.68 1615,1910 ; v2(2214.68,2140.32) 2214.68,1910.32 2215,1910 ; v2(2555.32,1759.68) 2555.32,1909.68 2555,1910 ; v2(3159.68,2140.32) 3159.68,1910.32 3160,1910 ; v2(3495.32,1754.68) 3495.32,1894.68 3480,1910 3160,1910 ; 1275,1910 1615,1910 ; 1615,1910 2215,1910 ; 2215,1910 2555,1910 ; 2555,1910 3160,1910
VM_stepperRegulator1: C2_stepperRegulator1.1 C3_stepperRegulator1.2 C4_stepperRegulator1.2 C5_stepperRegulator1.2 D3_stepperRegulator1.A L1_stepperRegulator1.2 P6_stepperRegulator1.1 P7_stepperRegulator1.2 R5_stepperRegulator1.1 | length 1645.3
  Top Layer w20: C4_stepperRegulator1.2 1686.34,3031.81 1730,2988.15 C2_stepperRegulator1.1 R5_stepperRegulator1.1
  Top Layer w40: C5_stepperRegulator1.2 1455,3008.15 1478.66,3031.81 C4_stepperRegulator1.2 1620,3273.15 1600,3293.15 D3_stepperRegulator1.A
  Bottom Layer w40: P6_stepperRegulator1.1 1476.85,3590 P7_stepperRegulator1.2 ; v1(1620,3160) L1_stepperRegulator1.2@1620,3223.15
VM_stepperRegulator2: C2_stepperRegulator2.1 C3_stepperRegulator2.2 C4_stepperRegulator2.2 C5_stepperRegulator2.2 D3_stepperRegulator2.A L1_stepperRegulator2.2 P6_stepperRegulator2.1 P7_stepperRegulator2.2 R5_stepperRegulator2.1 | length 1626.6
  Top Layer w20: C4_stepperRegulator2.2 2648.66,3031.81 2674,3006.47 C2_stepperRegulator2.1 R5_stepperRegulator2.1
  Top Layer w40: C5_stepperRegulator2.2@2395,3008.15 2418.66,3031.81 C4_stepperRegulator2.2 2560,3273.15 D3_stepperRegulator2.A@2540,3293.15
  Bottom Layer w40: P6_stepperRegulator2.1 2414.85,3590 P7_stepperRegulator2.2 ; v1(2560,3160) L1_stepperRegulator2.2@2560,3223.15
VM_stepperRegulator3: C2_stepperRegulator3.1 C3_stepperRegulator3.2 C4_stepperRegulator3.2 C5_stepperRegulator3.2 D3_stepperRegulator3.A L1_stepperRegulator3.2 P6_stepperRegulator3.1 P7_stepperRegulator3.2 R5_stepperRegulator3.1 | length 1658.6
  Top Layer w20: C4_stepperRegulator3.2@3500,3033.15 3595,3033.15 3618,3010.15 C2_stepperRegulator3.1 R5_stepperRegulator3.1
  Top Layer w40: C5_stepperRegulator3.2@3335,3009.49 3358.66,3033.15 3500,3033.15 3500,3274.49 D3_stepperRegulator3.A@3480,3294.49
  Bottom Layer w40: P6_stepperRegulator3.1 3347.85,3585 P7_stepperRegulator3.2 ; v1(3500,3160) L1_stepperRegulator3.2@3500,3224.49
VM_stepperRegulator4: C2_stepperRegulator4.1 C3_stepperRegulator4.2 C4_stepperRegulator4.2 C5_stepperRegulator4.2 D3_stepperRegulator4.A L1_stepperRegulator4.2 P6_stepperRegulator4.1 P7_stepperRegulator4.2 R5_stepperRegulator4.1 | length 1627.9
  Top Layer w20: R5_stepperRegulator4.1 C2_stepperRegulator4.1 3038,888.85 3058.66,868.19 3160,868.19
  Top Layer w40: D3_stepperRegulator4.A@3195,606.85 3180,606.85 3160,626.85 3160,751.85 3160,868.19 3301.34,868.19 C5_stepperRegulator4.2@3325,891.85
  Bottom Layer w40: P7_stepperRegulator4.2 3329.15,330 P6_stepperRegulator4.1 ; L1_stepperRegulator4.2@3160,676.85 v1(3160,726.85)
VM_stepperRegulator5: C2_stepperRegulator5.1 C3_stepperRegulator5.2 C4_stepperRegulator5.2 C5_stepperRegulator5.2 D3_stepperRegulator5.A L1_stepperRegulator5.2 P6_stepperRegulator5.1 P7_stepperRegulator5.2 R5_stepperRegulator5.1 | length 1695
  Top Layer w20: R5_stepperRegulator5.1 C2_stepperRegulator5.1 2094,862.85 2113.66,843.19 C4_stepperRegulator5.2
  Top Layer w40: D3_stepperRegulator5.A@2242.5,609.35 2220,631.85 v1(2220,726.85) C4_stepperRegulator5.2 2361.34,843.19 2390,871.85 C5_stepperRegulator5.2
  Bottom Layer w40: P7_stepperRegulator5.2 2376.15,315 P6_stepperRegulator5.1 ; L1_stepperRegulator5.2@2220,651.85 v1(2220,726.85)
VM_stepperRegulator6: C2_stepperRegulator6.1 C3_stepperRegulator6.2 C4_stepperRegulator6.2 C5_stepperRegulator6.2 D3_stepperRegulator6.A L1_stepperRegulator6.2 P6_stepperRegulator6.1 P7_stepperRegulator6.2 R5_stepperRegulator6.1 | length 1643.7
  Top Layer w20: R5_stepperRegulator6.1 C2_stepperRegulator6.1 1150,876.85 1175,851.85 C4_stepperRegulator6.2@1280,851.85
  Top Layer w40: D3_stepperRegulator6.A@1305,611.85 1280,636.85 v1(1280,735.51) 1280,851.85 1421.34,851.85 1445,875.51
  Bottom Layer w40: P7_stepperRegulator6.2 1438.15,315 P6_stepperRegulator6.1 ; L1_stepperRegulator6.2@1280,660.51 v1(1280,735.51)
pads on no net: U1_stepperRegulator1.2 U1_stepperRegulator1.3 U1_stepperRegulator2.2 U1_stepperRegulator2.3 U1_stepperRegulator3.2 U1_stepperRegulator3.3 U1_stepperRegulator4.2 U1_stepperRegulator4.3 U1_stepperRegulator5.2 U1_stepperRegulator5.3 U1_stepperRegulator6.2 U1_stepperRegulator6.3

## Keep-outs
Keep-Out Layer:
  the board outline again, w10

## Other copper
Top Layer:
  rectangle net +24: 3885,1935 4410,2500
  rectangle net +24: 570,1795 915,2400
  rectangle net +24: 435,2260 915,2490
  rectangle net +24: 645,1795 4410,2105
  rectangle net +24: 965,2403.15 1280,2433.15
  rectangle net +24: 1907,2403.15 2222,2433.15
  rectangle net +24: 2849,2403.15 3164,2433.15
  region net +24: 3809,1496.85 3494,1496.85 3494,1466.85 3809,1466.85
  region net +24: 2867,1496.85 2552,1496.85 2552,1466.85 2867,1466.85
  region net +24: 1925,1496.85 1610,1496.85 1610,1466.85 1925,1466.85
  rectangle net +24: 3885,2455 4165,3790
  rectangle net +24: 4030,3710 4365,3790
  rectangle net +24: 4030,3360 4365,3440
  rectangle net +24: 4030,3010 4365,3090
Bottom Layer:
  rectangle net EGND: 715,3690 4165,3880
  rectangle net EGND: 635,55 4165,250
  rectangle net EGND: 765,2820 4000,3115
  rectangle net EGND: 725,775 3980,1085
  rectangle net NetC1_stepperRegulator1_2: 1315,2468.15 1365,2603.15
  rectangle net NetC1_stepperRegulator2_2: 2250,2468.15 2305,2613.15
  rectangle net NetC1_stepperRegulator3_2: 3195,2468.15 3250,2613.15
  region net NetC1_stepperRegulator4_2: 3465,1431.85 3410,1431.85 3410,1271.85 3465,1271.85
  region net NetC1_stepperRegulator5_2: 2520,1431.85 2470,1431.85 2470,1231.85 2520,1231.85
  region net NetC1_stepperRegulator6_2: 1580,1431.85 1525,1431.85 1525,1266.85 1580,1266.85
  region net VM_stepperRegulator6: 1555,566.85 1455,566.85 1455,326.85 1555,326.85
  region net VM_stepperRegulator5: 2490,586.85 2395,586.85 2395,326.85 2490,326.85
  region net VM_stepperRegulator4: 3435,571.85 3330,571.85 3330,326.85 3435,326.85
  rectangle net VM_stepperRegulator3: 3230,3323.15 3330,3573.15
  rectangle net VM_stepperRegulator2: 2295,3323.15 2390,3573.15
  rectangle net VM_stepperRegulator1: 1355,3308.15 1455,3573.15
  rectangle net VM_stepperRegulator1: 960,3253.15 1245,3298.15
  rectangle net VM_stepperRegulator2: 1890,3248.15 2170,3298.15
  rectangle net VM_stepperRegulator3: 2835,3248.15 3145,3308.15
  region net VM_stepperRegulator4: 3830,651.85 3495,651.85 3495,596.85 3830,596.85
  region net VM_stepperRegulator5: 2885,651.85 2570,651.85 2570,596.85 2885,596.85
  region net VM_stepperRegulator6: 1945,651.85 1625,651.85 1625,596.85 1945,596.85
  rectangle net +24: 1280,2403.15 1360,2433.15
  rectangle net +24: 2222,2403.15 2302,2433.15
  rectangle net +24: 3164,2403.15 3244,2433.15
  region net +24: 3494,1496.85 3414,1496.85 3414,1466.85 3494,1466.85
  region net +24: 2552,1496.85 2472,1496.85 2472,1466.85 2552,1466.85
  region net +24: 1610,1496.85 1530,1496.85 1530,1466.85 1610,1466.85
  rectangle net EGND: 3900,110 4165,3845
  rectangle net EGND: 635,95 875,3880
  rectangle net EGND: 430,2565 810,3115
  rectangle net EGND: 505,1475 780,1580
  rectangle net EGND: 4025,2555 4410,2865
  rectangle net EGND: 1150,3455 1260,3750
  rectangle net EGND: 2088,3455 2198,3750
  rectangle net EGND: 3026,3455 3136,3750
  region net EGND: 3636,445 3526,445 3526,150 3636,150
  region net EGND: 2698,445 2588,445 2588,150 2698,150
  region net EGND: 1760,445 1650,445 1650,150 1760,150
  rectangle net EGND: 4020,3610 4365,3685
  rectangle net EGND: 4020,3260 4365,3335
  rectangle net EGND: 4020,2910 4365,2985

## Silkscreen, mask and mechanical layers (free items; w line width, h text height)
Top Overlay:
  text "12V" at 2595,3730 h60
  text "12V" at 3575,3725 h60
  text "12V" at 1660,3720 h60
  text "24V" at 4135,3710 h60 r90
  text "12V" at 1365,3380 h60
  text "12V" at 2305,3380 h60
  text "12V" at 3235,3375 h60
  text "24V" at 4135,3360 h60 r90
  text "24V" at 4125,3010 h60 r90
  text "24V" at 730,2470 h60 r270
  text "24V" at 4200,2380 h60 r90
  text "理应由理" at 660,1170 h300 r270
  text "12V" at 3340,485 h60
  text "12V" at 2400,480 h60
  text "12V" at 1460,475 h60
  text "12V" at 1165,140 h60
  text "12V" at 3030,140 h60
  text "12V" at 2080,135 h60